# Altium PCB hiiri627v07.PcbDoc (part 1 of 3)
Units mm, origin at the board's own origin, x right, y up, seen from the top; angles counter-clockwise.
Board outline 78.49 x 90.04 mm, 2 copper layers (Top, Bottom); 69 components, 154 nets, 484 pads, 208 vias.
Unrouted connection lines stored in the file: 5.
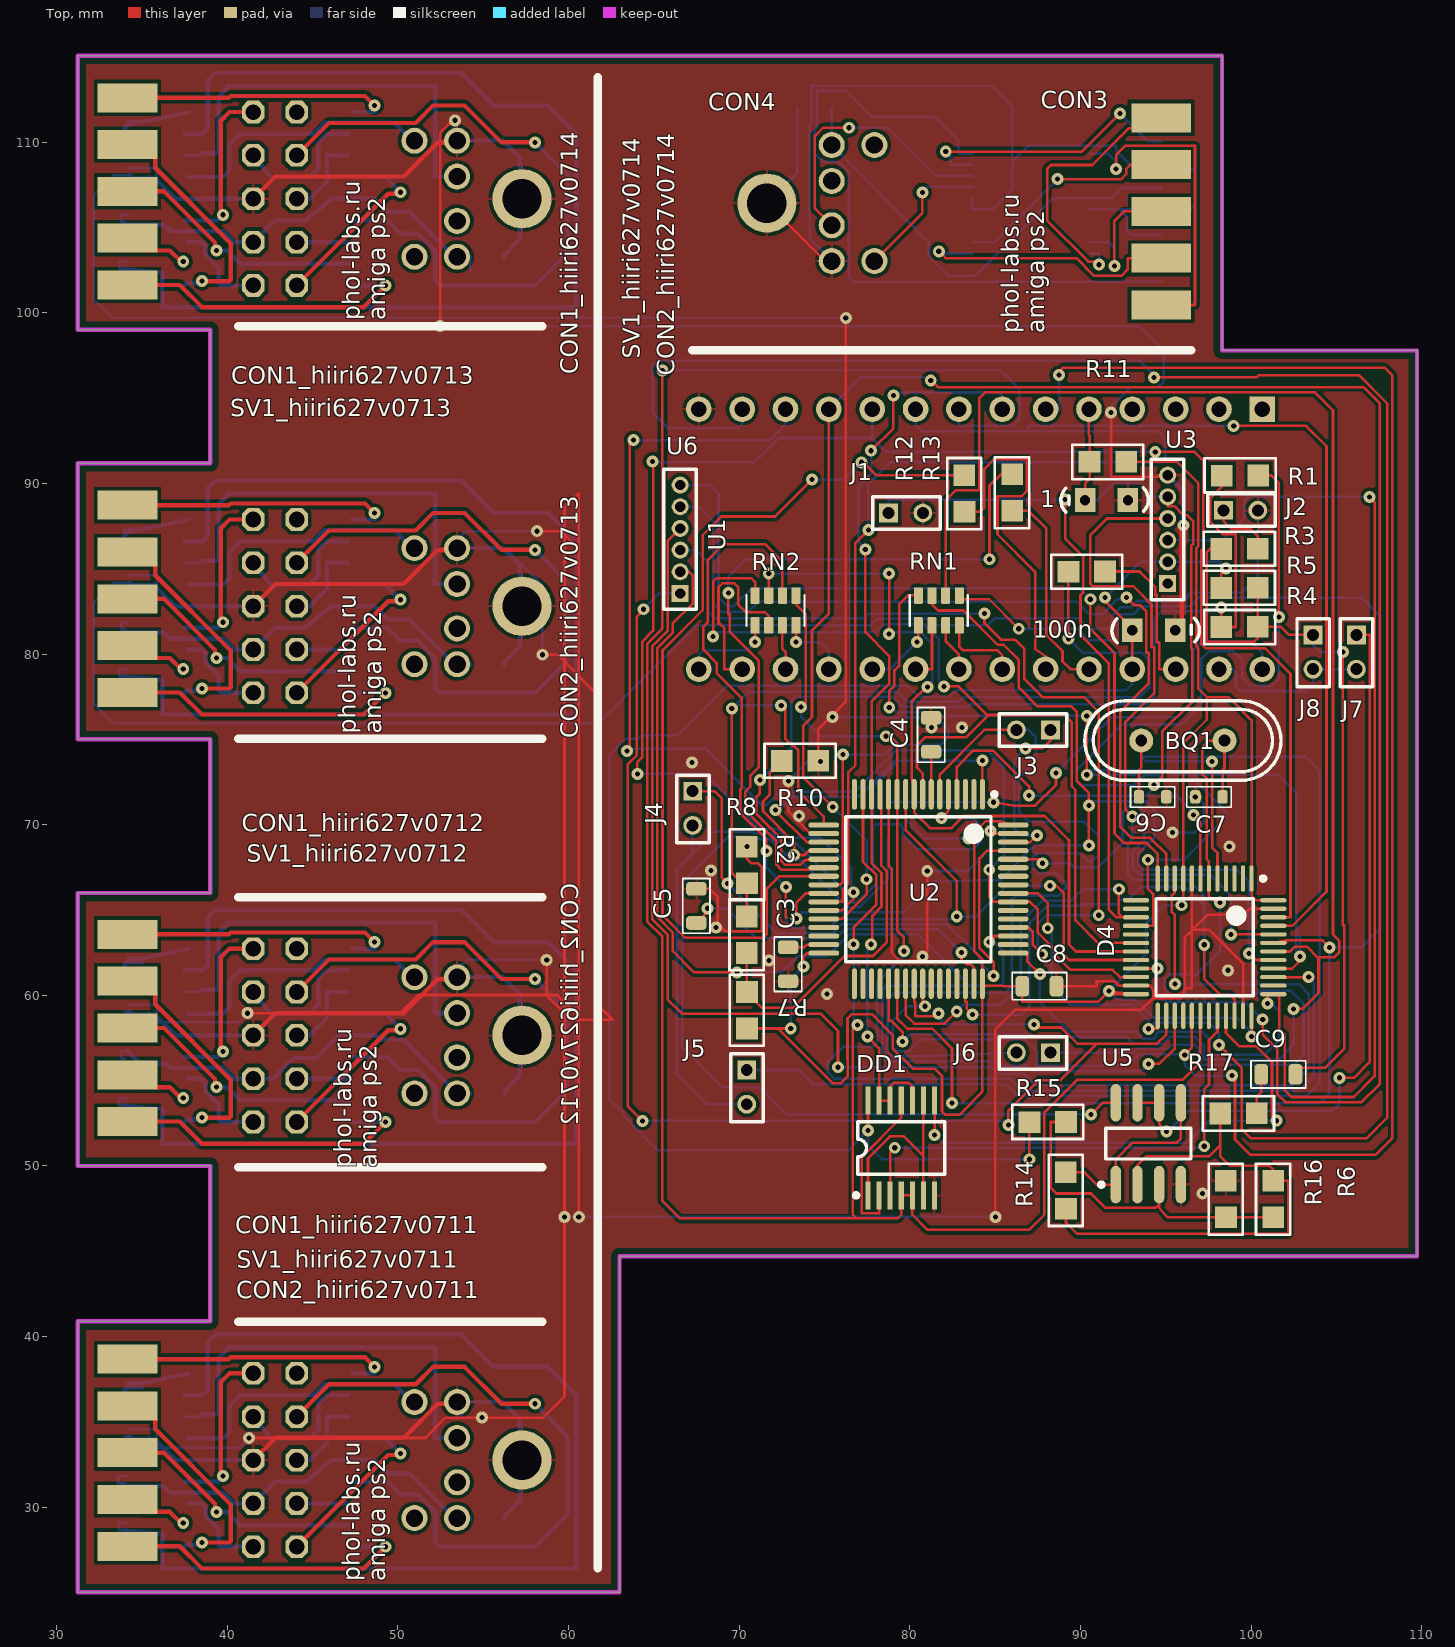
[diagram p0: Top view]
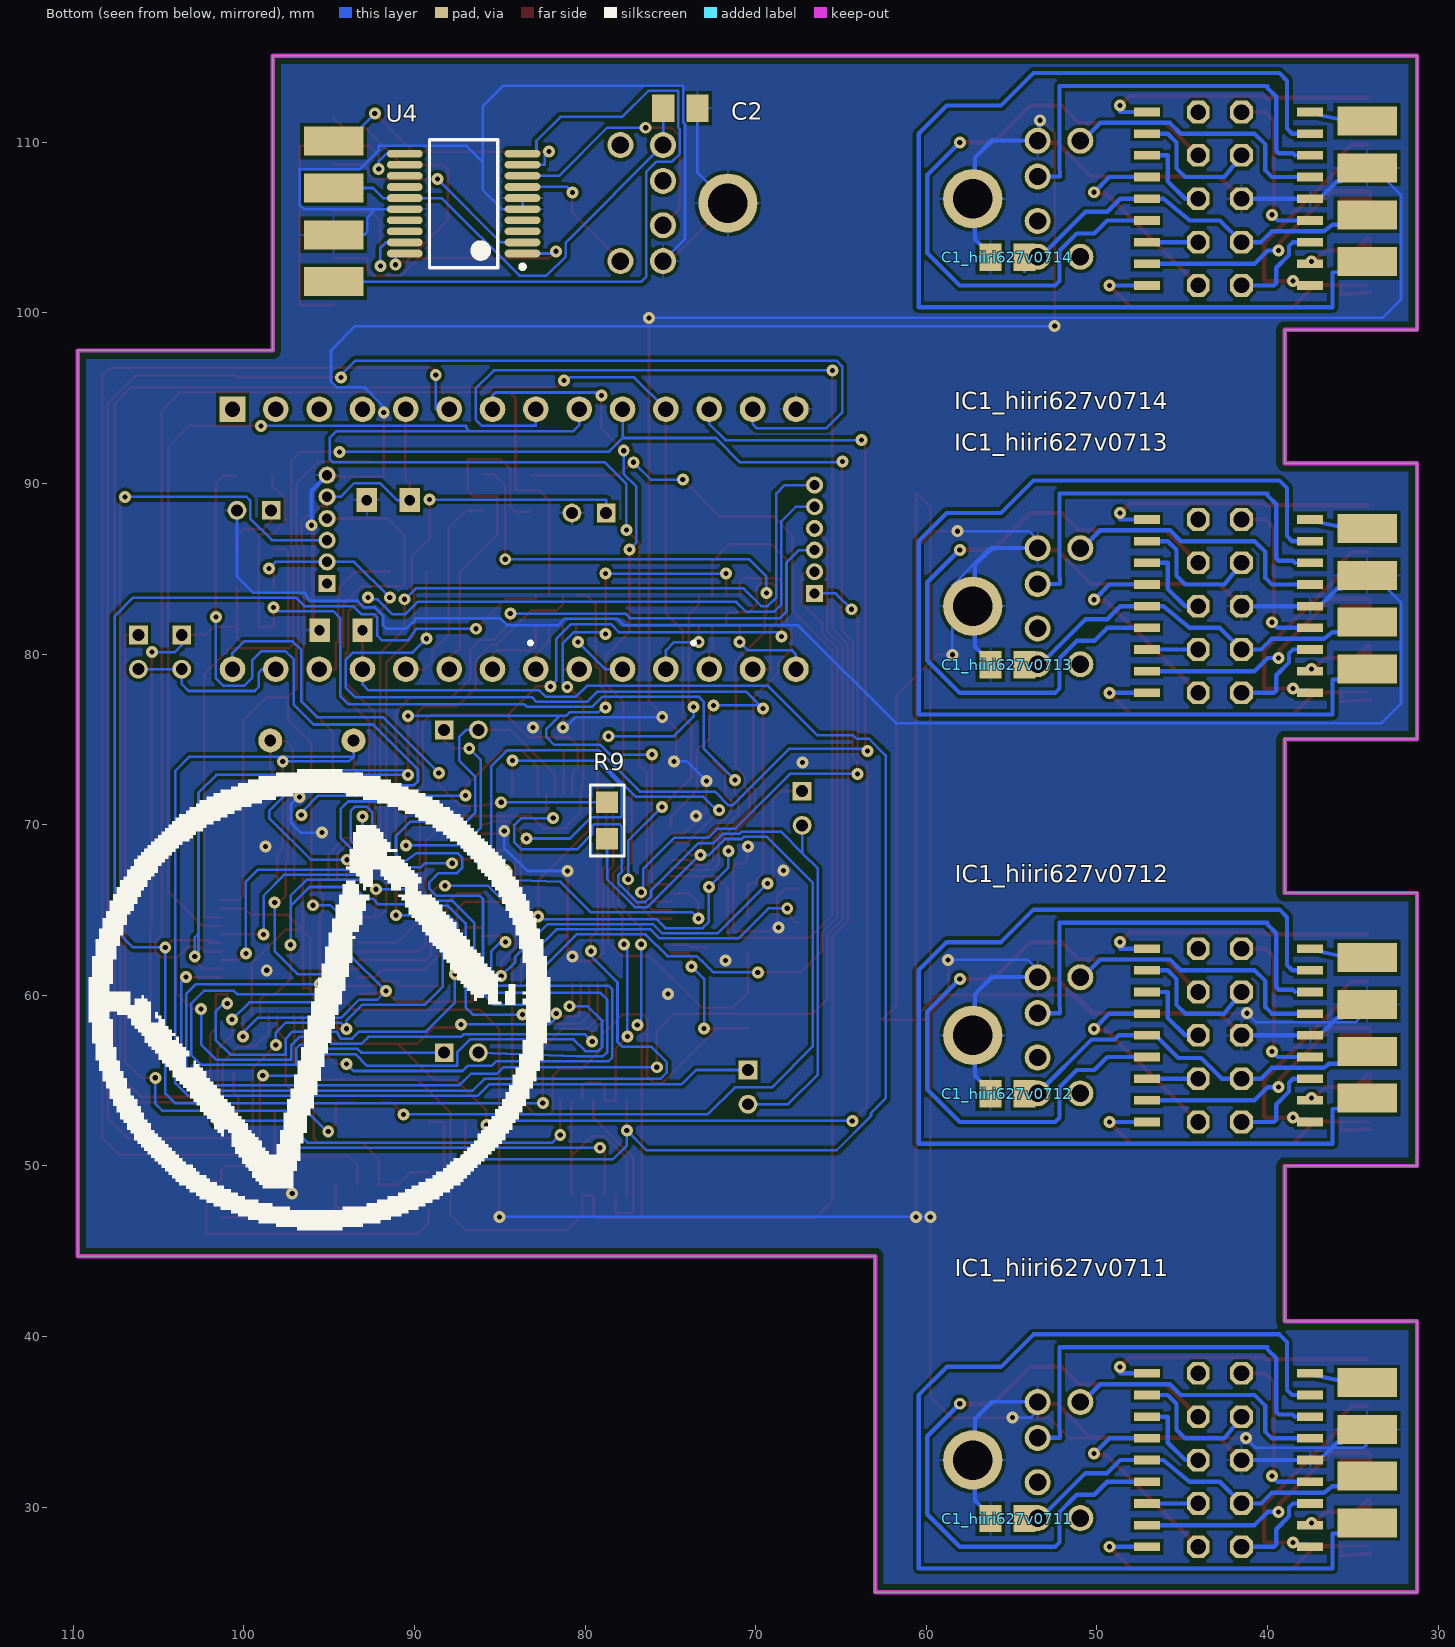
[diagram p1: Bottom view, seen from below]

## Layer stack, top to bottom
Top Solder: solder mask 0.0102, Solder Resist, Dk 3.5
Top: signal copper 0.035
Dielectric 1: dielectric 0.32, FR-4, Dk 4.8
Bottom: signal copper 0.035
Bottom Solder: solder mask 0.0102, Solder Resist, Dk 3.5

## Board outline
98.298,97.79 109.728,97.79 109.728,44.704 62.992,44.704 62.992,25.019 31.242,25.019 31.242,40.894 39,40.894 39,50 31.242,50 31.242,66 39,66 39,75 31.242,75 31.242,91.186 39,91.186 39,99 31.242,99 31.242,115.062 98.298,115.062 98.298,99

## Design rules (kind name [scope] priority, off if disabled: settings)
BackDrilling [All] p1: maxstublength=0.381 usetopbackdrill=TRUE usebottombackdrill=TRUE holeoversize=0.025 holetolplus=0 holetolminus=0
BoardOutlineClearance [All] p1: gap=0.5 ignorepadtopadclearanceinfootprint=FALSE except(0: Arc-SplitBarrior Arc-SplitContinuation Track-SplitBarrior Track-SplitContinuation SMDPad-SplitContinuation THPad-SplitContinuation Via-SplitBarrior Via-SplitContinuation Fill-SplitBarrior Fill-SplitContinuation Poly-SplitBarrior Poly-SplitContinuation Region-SplitBarrior Region-SplitContinuation Text-SplitBarrior Text-SplitContinuation)
Clearance [All] p1: gap=0.15 ignorepadtopadclearanceinfootprint=FALSE except(0.2: Arc-Fill Arc-Poly Arc-Region Track-Fill Track-Poly Track-Region SMDPad-Fill SMDPad-Poly SMDPad-Region THPad-Fill THPad-Poly THPad-Region Via-Fill Via-Poly Via-Region Fill-Fill Fill-Poly Fill-Region Poly-Poly Poly-Region Region-Region)
ComponentClearance [All] p1: gap=-0.05 collisioncheckmode=3 verticalgap=0 showdistances=TRUE
DiffPairsRouting [All] p1: maxlimit=0.15 minlimit=0.15 mostfreqgap=0.15 toplayer_minwidth=0.15 toplayer_maxwidth=0.15 toplayer_prefwidth=0.15 bottomlayer_minwidth=0.15 bottomlayer_maxwidth=0.15 bottomlayer_prefwidth=0.15 maxuncoupledlength=5
FabricationTestPointUsage TestPointUsage [All] p1: valid=0 allowmultiple=FALSE
FabricationTestpoint Testpoint [All] p1: side=3 testpointundercomponent=TRUE minsize=1.016 maxsize=2.54 preferedsize=1.524 minholesize=0.508 maxholesize=1.016 preferedholesize=0.813 testpointgrid=0.025 allowsidetop=TRUE allowsidebottom=TRUE usegrid=TRUE gridtolerance=0
Height [All] p1: minheight=0 maxheight=50 prefheight=10
HoleSize [All] p1: absolutevalues=TRUE maxlimit=5 minlimit=0.3 maxpercent=80.000 minpercent=20.000
HoleToHoleClearance [All] p1: gap=0.4 allowstackedmicrovias=TRUE
MinimumAnnularRing [All] p1: minimumring=0.2
MinimumSolderMaskSliver [All] p1: minsoldermaskwidth=0.15
PlaneClearance [All] p1: clearance=0.254
PolygonConnect [All] p1: thpad.connectstyle=Relief thpad.reliefconductorwidth=0.15 thpad.reliefentries=4 thpad.polygonreliefangle="90 Angle" thpad.airgapwidth=0.2 smdpad.connectstyle=Relief smdpad.reliefconductorwidth=0.15 smdpad.reliefentries=4 smdpad.polygonreliefangle="90 Angle" smdpad.airgapwidth=0.2 via.connectstyle=Direct via.reliefconductorwidth=0.15 via.reliefentries=4 via.polygonreliefangle="90 Angle" via.airgapwidth=0.2
RoomDefinition U_hiiri627v071_ssop [InComponentClass('U_hiiri627v071_ssop')] p1 off: confinementstyle=ConfineIn formatcopy=TRUE lockcomponents=FALSE outline 97.78,115.126 66.644,115.126 66.644,99.03 97.78,99.03
RoomDefinition hiiri627v0712 [InComponentClass('hiiri627v0712')] p2 off: confinementstyle=ConfineIn formatcopy=TRUE lockcomponents=FALSE outline 31.242,50.038 62.992,50.038 62.992,65.786 31.242,65.786
RoomDefinition U_UltiSID [InComponentClass('U_UltiSID')] p3 off: confinementstyle=ConfineIn formatcopy=TRUE lockcomponents=FALSE outline 63.246,97.282 63.246,45.329 109.296,45.329 109.296,97.282
RoomDefinition hiiri627v0711 [InComponentClass('hiiri627v0711')] p4 off: confinementstyle=ConfineIn formatcopy=TRUE lockcomponents=FALSE outline 31.242,25.146 62.992,25.146 62.992,40.894 31.242,40.894
RoomDefinition hiiri627v0713 [InComponentClass('hiiri627v0713')] p5 off: confinementstyle=ConfineIn formatcopy=TRUE lockcomponents=FALSE outline 31.242,75.184 62.992,75.184 62.992,90.932 31.242,90.932
RoomDefinition hiiri627v0714 [InComponentClass('hiiri627v0714')] p6 off: confinementstyle=ConfineIn formatcopy=TRUE lockcomponents=FALSE outline 31.242,99.06 62.992,99.06 62.992,114.808 31.242,114.808
RoutingVias [All] p1: holewidth=0.3 width=0.7 viastyle="Through Hole" minholewidth=0.3 minwidth=0.7 maxholewidth=2 maxwidth=3 useviatemplates=TRUE viatemplateguid#1={806BE7FC-D5AC-4F6C-A739-705B8047BAD4} viatemplatename#1=v70h30
SilkToSilkClearance [All] p1: silktosilkclearance=0.15
SilkToSolderMaskClearance SilkscreenOverComponentPads [IsPad] p1: minsilkscreentomaskgap=0.1 clearancetoexposedcopper=TRUE
SolderMaskExpansion [All] p1: expansion=0.075 istentingtop=FALSE
ViasUnderSMD [All] p1: allowed=TRUE
Width [All] p1: maxlimit=5 minlimit=0.15 preferedwidth=0.15
19 further rules are at their usual default settings.

## Classes and differential pairs
component class U_hiiri627v071_ssop: C2 CON3 CON4 U4
component class hiiri627v0714: C1_hiiri627v0714 CON1_hiiri627v0714 CON2_hiiri627v0714 IC1_hiiri627v0714 SV1_hiiri627v0714
component class hiiri627v0713: C1_hiiri627v0713 CON1_hiiri627v0713 CON2_hiiri627v0713 IC1_hiiri627v0713 SV1_hiiri627v0713
component class hiiri627v0712: C1_hiiri627v0712 CON1_hiiri627v0712 CON2_hiiri627v0712 IC1_hiiri627v0712 SV1_hiiri627v0712
component class hiiri627v0711: C1_hiiri627v0711 CON1_hiiri627v0711 CON2_hiiri627v0711 IC1_hiiri627v0711 SV1_hiiri627v0711
channel class hiiri627v071: M1 M2 M3 M4

## Components (designator, comment, footprint, x,y, rotation, side; value= is the part's Value field where it differs from the comment)
1 "C" "THROUGH HOLE - CAP POL (mini)" 92.786,89.017 r180 top
100n "C" "THROUGH HOLE - CAP POL (mini)" 93.04,81.397 r0 top
BQ1 "XTAL" XTAL_HC-49/U 96.005,74.93 r0 top value="8 MHz"
C1_hiiri627v0711 "C-EUC0805K" C0805K 55.245,29.083 r0 bottom (schematic designator C1)
C1_hiiri627v0712 "C-EUC0805K" C0805K 55.245,53.975 r0 bottom (schematic designator C1)
C1_hiiri627v0713 "C-EUC0805K" C0805K 55.245,79.121 r0 bottom (schematic designator C1)
C1_hiiri627v0714 "C-EUC0805K" C0805K 55.245,102.997 r0 bottom (schematic designator C1)
C2 "C-EUC0805K" C0805K 74.412,112.238 r180 bottom
C3 "CAP" C-0805 72.866,61.82 r270 top value=10.0
C4 "CAP" C-0805 81.248,75.266 r270 top value=10.0
C5 "CAP" C-0805 67.495,65.243 r90 top value=10.0
C6 "CAP" C-0603 94.234,71.628 r0 top value=12
C7 "CAP" C-0603 97.532,71.628 r180 top value=12
C8 "CAP" C-0805 87.598,60.534 r0 top value=10.0
C9 "CAP" C-0805 101.6,55.372 r0 top value=10.0
CON1_hiiri627v0711 "F09D" F09D 28.118,32.944 r90 top (schematic designator CON1)
CON1_hiiri627v0712 "F09D" F09D 28.118,57.836 r90 top (schematic designator CON1)
CON1_hiiri627v0713 "F09D" F09D 28.118,82.982 r90 top (schematic designator CON1)
CON1_hiiri627v0714 "F09D" F09D 28.118,106.858 r90 top (schematic designator CON1)
CON2_hiiri627v0711 "MINIDIN6PCB" MINIDIN6PCB 55.626,32.512 r90 top (schematic designator CON2)
CON2_hiiri627v0712 "MINIDIN6PCB" MINIDIN6PCB 55.626,57.404 r90 top (schematic designator CON2)
CON2_hiiri627v0713 "MINIDIN6PCB" MINIDIN6PCB 55.626,82.55 r90 top (schematic designator CON2)
CON2_hiiri627v0714 "MINIDIN6PCB" MINIDIN6PCB 55.626,106.426 r90 top (schematic designator CON2)
CON3 "F09D" F09D 100.777,106.193 r270 top
CON4 "MINIDIN6PCB" MINIDIN6PCB 73.278,106.68 r270 top
D4 "Microcontroller" TQFP48_L 97.282,62.82 r270 top value=STM32F103C6
DD1 "M74HC00B1R" TSSOP14 79.502,51.054 r0 top
IC1_hiiri627v0711 "PIC16F627A1010" SO18-10101020 42.291,33.02 r90 bottom (schematic designator IC1)
IC1_hiiri627v0712 "PIC16F627A1010" SO18-10101020 42.291,57.912 r90 bottom (schematic designator IC1)
IC1_hiiri627v0713 "PIC16F627A1010" SO18-10101020 42.291,83.058 r90 bottom (schematic designator IC1)
IC1_hiiri627v0714 "PIC16F627A1010" SO18-10101020 42.291,106.934 r90 bottom (schematic designator IC1)
J1 "Jumper" "2-PIN HEADER SMALL 2mm" 78.76,88.265 r0 top
J2 "Jumper" "2-PIN HEADER SMALL 2mm" 98.389,88.422 r0 top
J3 "Jumper" "2-PIN HEADER SMALL 2mm" 88.255,75.555 r180 top
J4 "Jumper" "2-PIN HEADER SMALL 2mm" 67.278,71.964 r270 top
J5 "Jumper" "2-PIN HEADER SMALL 2mm" 70.447,55.626 r270 top
J6 "Jumper" "2-PIN HEADER SMALL 2mm" 88.255,56.642 r180 top
J7 "Jumper" "2-PIN HEADER SMALL 2mm" 106.172,81.118 r270 top
J8 "Jumper" "2-PIN HEADER SMALL 2mm" 103.632,81.118 r270 top
R1 "1K" "SMD-0805 - R" 98.287,90.456 r0 top
R2 "4K7" "SMD-0805 - R" 70.453,62.477 r90 top
R3 "1K" "SMD-0805 - R" 98.253,86.158 r0 top
R4 "2K2" "SMD-0805 - R" 100.395,81.592 r180 top
R5 "4K7" "SMD-0805 - R" 98.253,83.872 r0 top
R6 "1K" "SMD-0805 - R" 98.532,46.99 r90 top
R7 "4K7" "SMD-0805 - R" 70.465,58.056 r90 top
R8 "4K7" "SMD-0805 - R" 70.453,68.714 r270 top
R9 "4K7" "SMD-0805 - R" 78.714,71.313 r270 bottom
R10 "4K7" "SMD-0805 - R" 72.502,73.737 r0 top
R11 "4K7" "SMD-0805 - R" 92.678,91.268 r180 top
R12 "1K" "SMD-0805 - R" 83.206,88.34 r90 top
R13 "1K" "SMD-0805 - R" 86.006,88.392 r90 top
R14 "4K7" "SMD-0805 - R" 89.154,47.498 r90 top
R15 "4K7" "SMD-0805 - R" 87.012,52.572 r0 top
R16 "4K7" "SMD-0805 - R" 101.307,46.99 r90 top
R17 "4K7" "SMD-0805 - R" 100.33,53.086 r180 top
RN1 "CAY16-101J4LF" RESCAF80P320X160X60-8N 81.702,82.55 r90 top
RN2 "CAY16-101J4LF" RESCAF80P320X160X60-8N 72.136,82.55 r90 top
SV1_hiiri627v0711 "ML10" ML10 42.799,32.512 r90 top (schematic designator SV1)
SV1_hiiri627v0712 "ML10" ML10 42.799,57.404 r90 top (schematic designator SV1)
SV1_hiiri627v0713 "ML10" ML10 42.799,82.55 r90 top (schematic designator SV1)
SV1_hiiri627v0714 "ML10" ML10 42.799,106.426 r90 top (schematic designator SV1)
U1 "nano Swin SID PCB" DIP-28-AY-38192-SID 100.575,94.381 r180 top locked
U2 "STM32F405RGT6" STM-LQFP64_N 80.51,66.227 r270 top
U3 "6PinConector" "6-PIN HEADER small 1.27mm" 95.113,84.132 r90 top
U4 "PIC16F627A-E/SS" SSOP-SS20_N 87.112,106.396 r0 bottom
U5 "TL072CD" SO8_N 93.98,51.308 r90 top
U6 "6PinConector" "6-PIN HEADER small 1.27mm" 66.548,83.552 r90 top
? "4K7" "SMD-0805 - R" 91.44,84.836 r180 top

## Footprints (in the part's own frame and the unit in brackets; to place one, negate y for a bottom-side part, rotate by r counter-clockwise, add the part's x,y. Pads: shape width x height; smd on the part's side, far side on the other; paste and mask are expansions set on the pad)
"2-PIN HEADER SMALL 2mm" [mm]
  rect 1.1x1.1 hole 0.7: 1(0,0)
  round 1.1 hole 0.7: 2(2.007,0)
  silkscreen extent -0.94,-0.94 3.02,0.97
"6-PIN HEADER small 1.27mm" [mm]
  rect 1x1 hole 0.6: 1(0,0)
  round 1 hole 0.6: 2(1.27,0) 3(2.54,0) 4(3.81,0) 5(5.08,0) 6(6.35,0)
  silkscreen extent -0.94,-0.94 7.29,0.97
C0805K [mm] "C0805K"
  rect 1.3x1.6 smd: 1(-1,-0.254) 2(1,-0.254)
  body extent -1.65,-1.05 1.65,0.55, height 1.27
C-0603 [mm] "Chip Capacitor, Body 1.6x0.8mm"
  rrect50% 0.6x0.8 smd: 1(-0.8,0) 2(0.8,0)
  silkscreen extent -1.3,-0.6 1.3,0.6, body extent -0.8,-0.4 0.8,0.4, height 0.82
C-0805 [mm] "Chip Capacitor, Body 2.0x1.25mm"
  rrect50% 0.8x1.2 smd: 1(-1,0) 2(1,0)
  silkscreen extent -1.6,-0.8 1.6,0.8, body extent -1,-0.62 1,0.63, height 0.62
DIP-28-AY-38192-SID [mm] "CerDIP, Window; 28 Leads; Row Spacing 15.24 mm; Pitch 2.54 mm"
  rect 1.5x1.5 hole 0.9: 1(-0.085,0.03)
  round 1.5 hole 0.9: 2(2.455,0.03) 3(4.995,0.03) 4(7.535,0.03) 5(10.075,0.03) 6(12.615,0.03) 7(15.155,0.03) 8(17.695,0.03) 9(20.235,0.03) 10(22.775,0.03) 11(25.315,0.03) 12(27.855,0.03) 13(30.395,0.03) 14(32.935,0.03) 15(32.935,15.27) 16(30.395,15.27) 17(27.855,15.27) 18(25.315,15.27) 19(22.775,15.27) 20(20.235,15.27) 21(17.695,15.27) 22(15.155,15.27) 23(12.615,15.27) 24(10.075,15.27) 25(7.535,15.27) 26(4.995,15.27) 27(2.455,15.27) 28(-0.085,15.27)
F09D [mil] "F09D"
  rect 66.93x137.8 smd: 1(-205.99,-237.98) 2(-98.01,-237.98) 3(10,-237.99) 4(118.01,-237.98) 5(225.99,-237.98)
  rect 66.93x137.8 smd far side: 6(-152,-238) 7(-44,-238) 8(64,-238) 9(172,-238)
  body extent -239,-307 259,-160, height 150
MINIDIN6PCB [mil] "MINIDIN6PCB"
  round 60 hole 40: 1(61.18,84.65) 2(-41.18,84.65) 3(143.86,84.65) 4(-123.86,84.65) 5(143.86,183.07) 6(-123.86,183.07)
  round 136.5 / inner round 60 / far side round 136.5 hole 91: G(10,-64.96)
  body extent -154,-111 174,213, height 50
ML10 [mil] "ML10"
  oct 52.29x52.29 / inner oct 60x60 / far side oct 52.29x52.29 hole 36: 1(-190,-50) 2(-190,50) 3(-90,-50) 4(-90,50) 5(10,-50) 6(10,50) 7(110,-50) 8(110,50) 9(210,-50) 10(210,50)
  body extent -220,-80 240,80, height 150
RESCAF80P320X160X60-8N [mm]
  rrect25% 0.97x0.53 smd: 1(-0.875,-1.2) 2(-0.875,-0.4) 3(-0.875,0.4) 4(-0.875,1.2) 5(0.875,1.2) 6(0.875,0.4) 7(0.875,-0.4) 8(0.875,-1.2)
  silkscreen extent -0.9,-1.7 0.9,1.7
"SMD-0805 - R" [mm]
  rect 1.27x1.27 smd: 1(0,0) 2(2.142,0.006)
  silkscreen extent -1.02,-0.99 3.15,1.02
SO8_N [mm] "SOIC, 8-Leads, Body 4.9x3.9mm, Pitch 1.27mm, IPC Medium Density"
  oval 2.2x0.6 smd: 1(-2.4,1.905) 2(-2.4,0.635) 3(-2.4,-0.635) 4(-2.4,-1.905) 5(2.4,-1.905) 6(2.4,-0.635) 7(2.4,0.635) 8(2.4,1.905)
  silkscreen extent -2.52,-2.5 0.9,2.88, body extent -1.95,-2.45 1.95,2.45, height 1.75
SO18-10101020 [mil] "SO18-10101020"
  rect 20x60 smd: 1(-210,-188.5) 2(-160,-188.5) 3(-110,-188.5) 4(-60,-188.5) 5(-10,-188.5) 6(40,-188.5) 7(90,-188.5) 8(140,-188.5) 9(190,-188.5) 10(190,188.5) 11(140,188.5) 12(90,188.5) 13(40,188.5) 14(-10,188.5) 15(-60,188.5) 16(-110,188.5) 17(-160,188.5) 18(-210,188.5)
  body extent -220,-218 200,218, height 50
SSOP-SS20_N [mm] "SOP, 20-Leads, Body 7.2x5.2mm, Pitch 0.65mm, IPC Medium Density"
  oval 2.1x0.45 smd: 1(-3.45,2.925) 2(-3.45,2.275) 3(-3.45,1.625) 4(-3.45,0.975) 5(-3.45,0.325) 6(-3.45,-0.325) 7(-3.45,-0.975) 8(-3.45,-1.625) 9(-3.45,-2.275) 10(-3.45,-2.925) 11(3.45,-2.925) 12(3.45,-2.275) 13(3.45,-1.625) 14(3.45,-0.975) 15(3.45,-0.325) 16(3.45,0.325) 17(3.45,0.975) 18(3.45,1.625) 19(3.45,2.275) 20(3.45,2.925)
  silkscreen extent -3.57,-3.75 2,3.82, body extent -2.7,-3.75 2.7,3.75, height 2
STM-LQFP64_N [mm] "Thin QFP, 64-Leads, Body 10x10mm, Pitch 0.5mm, IPC Medium Density"
  oval 1.8x0.3 smd: 1(-5.55,3.75) 2(-5.55,3.25) 3(-5.55,2.75) 4(-5.55,2.25) 5(-5.55,1.75) 6(-5.55,1.25) 7(-5.55,0.75) 8(-5.55,0.25) 9(-5.55,-0.25) 10(-5.55,-0.75) 11(-5.55,-1.25) 12(-5.55,-1.75) 13(-5.55,-2.25) 14(-5.55,-2.75) 15(-5.55,-3.25) 16(-5.55,-3.75) 33(5.55,-3.75) 34(5.55,-3.25) 35(5.55,-2.75) 36(5.55,-2.25) 37(5.55,-1.75) 38(5.55,-1.25) 39(5.55,-0.75) 40(5.55,-0.25) 41(5.55,0.25) 42(5.55,0.75) 43(5.55,1.25) 44(5.55,1.75) 45(5.55,2.25) 46(5.55,2.75) 47(5.55,3.25) 48(5.55,3.75)
  oval 0.3x1.8 smd: 17(-3.75,-5.55) 18(-3.25,-5.55) 19(-2.75,-5.55) 20(-2.25,-5.55) 21(-1.75,-5.55) 22(-1.25,-5.55) 23(-0.75,-5.55) 24(-0.25,-5.55) 25(0.25,-5.55) 26(0.75,-5.55) 27(1.25,-5.55) 28(1.75,-5.55) 29(2.25,-5.55) 30(2.75,-5.55) 31(3.25,-5.55) 32(3.75,-5.55) 49(3.75,5.55) 50(3.25,5.55) 51(2.75,5.55) 52(2.25,5.55) 53(1.75,5.55) 54(1.25,5.55) 55(0.75,5.55) 56(0.25,5.55) 57(-0.25,5.55) 58(-0.75,5.55) 59(-1.25,5.55) 60(-1.75,5.55) 61(-2.25,5.55) 62(-2.75,5.55) 63(-3.25,5.55) 64(-3.75,5.55)
  silkscreen extent -5.67,-4.25 4.25,4.58, body extent -5,-5 5,5, height 1.6
"THROUGH HOLE - CAP POL (mini)" [mm]
  rect 1.2x1.4 hole 0.6: 1(0,0) 2(2.515,0)
  silkscreen extent -1.19,-0.74 3.93,0.71
TQFP48_L [mm] "48-Pin Thin Quad Flat Pack 0.5 mm Pitch, IPC High Density"
  oval 1.55x0.25 smd: 1(-4.025,2.75) 2(-4.025,2.25) 3(-4.025,1.75) 4(-4.025,1.25) 5(-4.025,0.75) 6(-4.025,0.25) 7(-4.025,-0.25) 8(-4.025,-0.75) 9(-4.025,-1.25) 10(-4.025,-1.75) 11(-4.025,-2.25) 12(-4.025,-2.75) 25(4.025,-2.75) 26(4.025,-2.25) 27(4.025,-1.75) 28(4.025,-1.25) 29(4.025,-0.75) 30(4.025,-0.25) 31(4.025,0.25) 32(4.025,0.75) 33(4.025,1.25) 34(4.025,1.75) 35(4.025,2.25) 36(4.025,2.75)
  oval 0.25x1.55 smd: 13(-2.75,-4.025) 14(-2.25,-4.025) 15(-1.75,-4.025) 16(-1.25,-4.025) 17(-0.75,-4.025) 18(-0.25,-4.025) 19(0.25,-4.025) 20(0.75,-4.025) 21(1.25,-4.025) 22(1.75,-4.025) 23(2.25,-4.025) 24(2.75,-4.025) 37(2.75,4.025) 38(2.25,4.025) 39(1.75,4.025) 40(1.25,4.025) 41(0.75,4.025) 42(0.25,4.025) 43(-0.25,4.025) 44(-0.75,4.025) 45(-1.25,4.025) 46(-1.75,4.025) 47(-2.25,4.025) 48(-2.75,4.025)
  silkscreen extent -4.15,-2.85 2.85,3.55, body extent -3.5,-3.5 3.5,3.5, height 1.6
TSSOP14 [mm] "Shrink Small Outline; 14 Leads; Body Width 4.4 mm; Pitch 0.65 mm"
  rect 0.3x1.65 smd: 1(-1.95,-2.775) 2(-1.3,-2.775) 3(-0.65,-2.775) 4(0,-2.775) 5(0.65,-2.775) 6(1.3,-2.775) 7(1.95,-2.775) 8(1.95,2.775) 9(1.3,2.775) 10(0.65,2.775) 11(0,2.775) 12(-0.65,2.775) 13(-1.3,2.775) 14(-1.95,2.775)
  silkscreen extent -2.77,-2.9 2.55,1.55
XTAL_HC-49/U [mm] "HC-49/U Leaded Cristal, Body 11.05x4.8mm; Pitch 4.88mm"
  round 1.4 hole 0.7: 1(-2.44,0) 2(2.44,0)
  silkscreen extent -5.75,-2.33 5.75,2.33, body extent -5.75,-2.33 5.75,2.33, height 3.5

## Part data
BQ1: "Crystal Oscillator", Manufacturer=NDK, Package=3225, Part Number=NX3225GD-8MHZ-STD-CRA-3, Tolerance="50 ppm", Parameters="8 MHz 8pF 50 ppm"
C1_hiiri627v0711 C1_hiiri627v0712 C1_hiiri627v0713 C1_hiiri627v0714 C2: "CAPACITOR, European symbol", DeviceName=C0805K, DeviceSetName=C-EU, GateName_1=G$1, LibraryName=rcl, SymbolName_1=C-EU
C3 C4 C5 C8 C9: "Capacitor", Alt Part Num=CC0805KKX7R6BB106, Manufacturer=Yageo, Package=0805, Part Number="0805-10uF 10V +/-10% X7R", Tolerance=10%, Parameters="X7R, 10V", Unit Price=0.0359
C6 C7: "Capacitor", Alt Part Num=CL10C120JB8NNNC, Manufacturer=Samsung, Package=0603, Part Number="0603-12pF 50V +/-5% NP0", Tolerance=5%, Parameters="NP0, 50V", Unit Price=0.0018
CON1_hiiri627v0711 CON1_hiiri627v0712 CON1_hiiri627v0713 CON1_hiiri627v0714 CON3: "SUB-D", DeviceName=D, DeviceSetName=F09, GateName_1=G$1, LibraryName=con-subd, SymbolName_1=F09
D4: library part STM32F103Cx, "MC Cortex-M3", Manufacturer=ST, Package=LQFP-48, Part Number=STM32F103C6T6A, Parameters=16-32K
DD1: "Quad 2-Input AND Gate TSSOP", ComponentLink1Description="Manufacturer Link", ComponentLink1URL=http://www.st.com/, ComponentLink2Description=Datasheet, ComponentLink2URL=http://www.st.com/stonline/products/literature/ds/1885/m74hc08.pdf, DatasheetVersion=Dec-1992, LatestRevisionDate=06-Jun-2005, LatestRevisionNote="Stylized 3D Model Added.", PackageDescription="DIP; 14 Leads; Row Spacing 7.62 mm; Pitch 2.54 mm", PackageReference=DIP14, PackageVersion=Jan-1997, Published=8-Jun-2000, Publisher="Altium Limited"
R1 R2 R3 R4 R5 R6 R7 R8 R9 R10 R11 R12 R13 R14 R15 R16 R17 ?: library part R
RN1 RN2: "10k Ohm Â±5% 62.5mW Power Per Element Isolated Resistor Network/Array Â±200ppm/Â°C 1206 (3216 Metric), Convex, Long Side Terminals", Package="1206 Bourns", Arrow_Electronics-Purchase-URL=https://snapeda.com/shop?store=Arrow+Electronics&id=47136, Availability=Good, DigiKey-Purchase-URL=https://snapeda.com/shop?store=DigiKey&id=47136, MF=Bourns, Mouser-Purchase-URL=https://snapeda.com/shop?store=Mouser&id=47136, MP=CAY16-103J4LF, Price=None, SnapEDA_Link=https://www.snapeda.com/parts/CAY16-103J4LF/Bourns%20-%20J.W.%20Miller/view-part/47136/?ref=snap
SV1_hiiri627v0711 SV1_hiiri627v0712 SV1_hiiri627v0713 SV1_hiiri627v0714: "HARTING", DeviceSetName=ML10, GateName_1=G$1, LibraryName=con-harting-ml, SymbolName_1=10P
U1: library part MOS6581_SID
U2: "ARM Cortex-M4 32-bit MCU+FPU, 210 DMIPS, 1024 kB Flash, 192 kB Internal RAM, 51 I/Os, 64-pin LQFP, -40 to 85 degC, Tray", I/Os (High Current)=51, Manufacturer=STMicroelectronics, Operating Frequency(F) (Processor speed) (MHz)=168, Supplier Part Number 1=497-11767-ND, Supply Voltage(Vcc) max (V)=3.6, Supply Voltage(Vcc) min (V)=1.8, ComponentLink1Description="Manufacturer URL", ComponentLink1URL=http://www.st.com/web/en/home.html, ComponentLink2Description=Datasheet, ComponentLink2URL=http://www.st.com/st-web-ui/static/active/en/resource/technical/document/datasheet/DM00037051.pdf, ComponentLink3Description="Package Specification", ComponentLink3URL=http://www.st.com/st-web-ui/static/active/en/resource/technical/document/datasheet/DM00037051.pdf, Core="ARM Cortex-M4", D/A Converter=2x12-bit, DatasheetVersion="Rev. 4", FLASH Size (Prog) (kB)=1024, Internal RAM Size (kB)=192, Mounting Technology="Surface Mount", PackageDescription="64-Pin Low Profile Quad Flat Package, 10 x 10 mm Body, 0.5 mm Pitch", PackageReference=LQFP64, PackageVersion="Rev. 4, 06/2013", Packing=Tray, PartNumber=STM32F405RGT6, Supplier 1=Digi-Key, Supplier 2=Farnell, Supplier 3=Newark, Supplier 4=Mouser, Supplier Part Number 2=2064363, Supplier Part Number 3=73T2329, Supplier Part Number 4=511-STM32F405RGT6
U4: "FLASH-Based 8-Bit CMOS Microcontroller with nanoWatt Technology, 1K (x14-Bit words) FLASH, 224 Bytes SRAM, 20-Pin SSOP, 3.0 to 5.5V Supply Range, Extended Temperature", Supplier Part Number 1=PIC16F627A-E/SS-ND, Code_IPC=SOP65P780-20, Code_JEDEC=MO-150, ComponentLink1Description=Datasheet, ComponentLink1URL=http://ww1.microchip.com/downloads/en/DeviceDoc/40044F.pdf, ComponentLink2Description="Packaging Specification", ComponentLink2URL=http://www.microchip.com/stellent/groups/techpub_sg/documents/packagingspec/en012702.pdf, ComponentLink3Description="Microchip.com Home", ComponentLink3URL=http://www.microchip.com/, DatasheetVersion="revF, Mar-2007", LatestRevisionDate=29-Jan-2009, LatestRevisionNote="Sch. layout revised. 3D Model Removed.", PackageDescription="20-Lead Plastic Shrink Small Outline (SS) - 5.3mm Body [SSOP]", PackageReference=SSOP-SS20, PackageVersion="revBB, Aug-2009", Published=11-Oct-2004, Publisher="Altium Limited", Supplier 1=Digi-Key
U5: "Low-Noise J-FET Dual Operational Amplifier", Code_IPC=SOIC127P600-8, Code_JEDEC=MS-012-AA, ComponentLink1Description="Manufacturer Link", ComponentLink1URL=http://www.st.com/, ComponentLink2Description=Datasheet, ComponentLink2URL=http://www.st.com/stonline/products/literature/ds/2298/tl072.pdf, DatasheetVersion=Dec-1998, LatestRevisionDate=13-Apr-2006, LatestRevisionNote="IPC-7351 Footprint Added.", PackageDescription="8-Pin Small Outline Integrated Circuit 1.27 mm Pitch", PackageReference=SO8, PackageVersion=Dec-2002, Published=24-Aug-2001, Publisher="Altium Limited"
CON2_hiiri627v0711 CON2_hiiri627v0712 CON2_hiiri627v0713 CON2_hiiri627v0714 CON4: DeviceSetName=MINIDIN6PCB, GateName_1=G$1, LibraryName=0mikacon, SymbolName_1=MINIDIN6PCB_SYM
IC1_hiiri627v0711 IC1_hiiri627v0712 IC1_hiiri627v0713 IC1_hiiri627v0714: DeviceName=1010, DeviceSetName=PIC16F627A, GateName_1=G$1, LibraryName=0mikalib, SymbolName_1=PIC16F627_SYM

## Via types
v1: diameter 0.7, hole 0.3, Top to Bottom, tented both sides, 208 vias

## Nets (pads, with @x,y where several pads share a name; then routed paths per layer and width w, separated by ;. In a path a pad name is that pad's centre, name@x,y a point inside that pad or via, vN(x,y) a via of type N, cw(c..) or ccw(c..) an arc to the next point about the centre after c; other vN are vias at no path point)
3V3: C8.1 D4.1 D4.9 D4.24 D4.36 D4.48 R7.1 R11.1 U2.1 U2.19 U2.32 U2.48 U2.64 | length 154.4
  Top w0.15: R7.1@70.465,58.056 72.271,58.056 ; v1(72.136,70.866) 72.136,70.806 73.965,68.977 U2.19@74.96,68.977 ; v1(73.025,58.056) 72.271,58.056 ; v1(73.762,61.697) 73.762,62.274 73.965,62.477 U2.32@74.96,62.477 ; U2.1@84.26,71.777 v1(84.26,73.752) ; U2.64@86.06,69.977 85.309,70.202 84.451,70.202 v1(83.439,69.19) 83.769,68.859 83.769,62.586 84.26,62.095 U2.48@84.26,60.677 U2.48@84.26,60.563 ; R11.1@92.678,91.268 95.65,91.268 96.906,90.012 96.906,86.315 96.793,86.202 96.793,80.456 96.906,80.342 96.906,77.978 97.404,77.48 ; v1(95.936,65.278) 96.032,65.374 D4.9@96.032,66.845 96.032,74.778 97.404,76.149 97.404,77.48 ; v1(100.032,57.582) D4.36@100.032,58.796 ; D4.48@101.307,65.571 100.298,65.571 100.032,65.837 D4.1@100.032,66.845 100.032,76.113 98.665,77.48 97.404,77.48 ; 72.271,58.056 75.489,54.839 75.937,54.839 76.369,55.27 76.369,56.261 76.352,56.261 76.352,58.649 76.606,58.903 77.775,58.903 78.994,57.683 78.994,56.896 80.188,55.702 81.458,55.702 81.89,55.27 81.89,53.204 82.093,53.001 82.906,53.001 84.26,54.355 U2.48@84.26,60.563 ; U2.48@84.26,60.563 85.458,60.563 85.486,60.534 C8.1@86.598,60.534 86.598,59.614 91.034,59.614 v1(91.669,60.249) ; v1(91.669,60.249) D4.24@93.257,60.07 91.669,60.07 v1(91.669,60.249)
  Bottom w0.15: v1(72.136,70.866) 72.285,70.866 72.457,71.039 72.477,71.039 73.066,71.628 77.001,71.628 77.851,72.478 ; v1(73.025,58.056) 73.025,60.96 v1(73.762,61.697) ; v1(83.439,69.19) 80.899,69.19 80.874,69.19 80.594,69.494 79.654,70.434 77.851,70.434 77.851,72.275 ; v1(84.26,73.752) 79.266,73.752 ; v1(95.936,65.278) 94.92,65.278 93.853,64.211 93.853,62.433 v1(91.669,60.249) 92.177,59.741 93.239,59.741 94.28,58.699 99.162,58.699 100.032,57.829 v1(100.032,57.582) ; 77.851,72.275 79.045,73.469 ; 77.851,72.275 77.851,72.478 ; 77.851,72.478 79.125,73.752 79.266,73.752 ; 77.851,72.478 79.045,73.469 ; 79.045,73.469 79.266,73.752
6581SEL: D4.15 J1.1 U2.39 | length 59.8
  Top w0.15: U2.39@79.76,60.677 79.76,58.846 80.264,58.342 82.04,58.342 v1(82.753,59.055) ; v1(89.103,89.052) 89.103,86.766 90.158,85.712 90.158,83.601 90.005,83.449 90.005,81.115 91.655,79.465 91.655,65.024 92.108,64.571 92.456,64.571 ; v1(92.253,66.218) 92.253,64.774 92.456,64.571 ; D4.15@93.257,64.571 92.456,64.571
  Bottom w0.15: J1.1@78.76,88.265 78.76,89.052 v1(89.103,89.052) ; v1(82.753,59.055) 83.15,59.452 85.344,59.452 86.501,60.609 86.501,64.265 87.782,65.546 89.459,65.546 90.131,66.218 v1(92.253,66.218)
!CS: D4.30 DD1.4 DD1.5 U1.8 U2.15 | length 148.2
  Top w0.15: v1(65.507,96.62) 65.507,81.486 64.611,80.591 64.611,64.332 65.507,63.437 65.507,47.955 66.533,46.929 76.882,46.929 ; v1(76.708,62.992) 76.708,63.983 78.045,65.32 78.045,67.04 77.26,67.825 U2.15@77.26,71.777 ; v1(76.937,58.268) 76.669,58 76.669,47.142 76.882,46.929 ; D4.30@97.032,58.796 97.032,56.083 95.991,55.042 89.793,55.042 87.884,53.133 87.884,47.142 86.995,46.253 81.041,46.253 80.152,47.142 DD1.5@80.152,48.279 DD1.4@79.502,48.279 79.502,47.142 79.289,46.929 76.882,46.929
  Bottom w0.15: v1(65.507,96.62) 85.344,96.62 86.411,95.553 86.411,93.751 86.035,93.376 82.88,93.376 U1.8@82.88,94.351 ; v1(76.708,62.992) 76.708,58.547 76.937,58.318 v1(76.937,58.268)
!READ: D4.32 DD1.3 | length 29
  Top w0.15: DD1.3@78.852,48.279 78.852,50.8 v1(79.12,51.068) ; v1(97.257,51.156) 97.257,54.508 97.536,54.788 97.536,57.379 98.032,57.875 D4.32@98.032,58.796
  Bottom w0.15: v1(79.12,51.068) 97.169,51.068 v1(97.257,51.156)
!RES: 1.2 D4.7 R11.2 U1.5 U2.4 U3.5 | length 52.4
  Top w0.15: U2.4@82.76,71.777 82.76,73.387 83.718,74.346 84.887,74.346 86.995,72.238 v1(86.995,71.704) ; 1.2@90.272,89.017 90.272,89.992 90.536,90.257 R11.2@90.536,91.263 90.536,92.786 90.5,92.822 U1.5@90.5,94.351 ; v1(94.31,72.314) 94.793,72.796 94.793,75.454 96.555,77.216 96.555,80.269 96.493,80.331 96.493,86.326 96.606,86.44 96.606,87.785 96.27,88.122 96.054,88.122 95.504,88.671 95.113,88.671 U3.5@95.113,89.212 ; v1(96.626,70.557) 97.032,70.151 D4.7@97.032,66.845
  Bottom w0.15: v1(86.995,71.704) 93.878,71.704 ; 1.2@90.272,89.017 91.008,89.017 92.009,90.018 93.523,90.018 94.328,89.212 U3.5@95.113,89.212 ; v1(94.31,72.314) 94.31,72.136 93.878,71.704 ; v1(96.626,70.557) 96.626,70.714 95.635,71.704 93.878,71.704
!WRITE: D4.33 DD1.8 | length 30.7
  Top w0.15: v1(81.452,51.825) DD1.8@81.452,53.829 ; D4.33@98.532,58.796 98.532,57.805 99.33,57.007 100.305,57.007 101.229,56.083 101.229,52.924 v1(101.498,52.654)
  Bottom w0.15: v1(81.452,51.825) 81.909,51.368 96.266,51.368 97.552,52.654 v1(101.498,52.654)
/2: D4.29 U1.6 U2.41 | length 111.6
  Top w0.15: U2.41@80.76,60.677 80.76,59.499 v1(80.899,59.36) ; v1(88.748,96.342) 88.748,96.491 88.902,96.645 88.902,96.701 88.989,96.789 107.808,96.789 108.281,96.316 108.281,51.639 107.29,50.648 99.974,50.648 99.06,51.562 99.06,55.296 v1(98.882,55.296) ; v1@96.072,56.557 v1(96.114,56.515) 96.532,56.933 D4.29@96.532,58.796
  Bottom w0.15: v1(80.899,59.36) 79.841,59.36 79.003,58.522 79.003,56.972 79.248,56.727 79.985,56.727 80.674,57.417 86.752,57.417 87.48,56.689 87.48,55.867 92.773,55.867 93.463,56.557 v1@96.072,56.557 ; U1.6@87.96,94.351 88.748,94.351 v1(88.748,96.342) ; v1(96.114,56.515) 96.114,55.905 96.723,55.296 v1(98.882,55.296)
_MCLR/VPP: U4.4
_MCLR/VPP_hiiri627v0711: IC1_hiiri627v0711.4 SV1_hiiri627v0711.10 | length 10.1
  Top w0.254: v1(39.751,31.826) 39.624,31.953 39.624,37.338 40.132,37.846 SV1_hiiri627v0711.10@41.529,37.846
  Bottom w0.254: IC1_hiiri627v0711.4@37.503,31.496 39.421,31.496 v1(39.751,31.826)
_MCLR/VPP_hiiri627v0712: IC1_hiiri627v0712.4 SV1_hiiri627v0712.10 | length 10.1
  Top w0.254: v1(39.751,56.718) 39.624,56.845 39.624,62.23 40.132,62.738 SV1_hiiri627v0712.10@41.529,62.738
  Bottom w0.254: IC1_hiiri627v0712.4@37.503,56.388 39.421,56.388 v1(39.751,56.718)
_MCLR/VPP_hiiri627v0713: IC1_hiiri627v0713.4 SV1_hiiri627v0713.10 | length 10.1
  Top w0.254: v1(39.751,81.864) 39.624,81.991 39.624,87.376 40.132,87.884 SV1_hiiri627v0713.10@41.529,87.884
  Bottom w0.254: IC1_hiiri627v0713.4@37.503,81.534 39.421,81.534 v1(39.751,81.864)
_MCLR/VPP_hiiri627v0714: IC1_hiiri627v0714.4 SV1_hiiri627v0714.10 | length 10.1
  Top w0.254: v1(39.751,105.74) 39.624,105.867 39.624,111.252 40.132,111.76 SV1_hiiri627v0714.10@41.529,111.76
  Bottom w0.254: IC1_hiiri627v0714.4@37.503,105.41 39.421,105.41 v1(39.751,105.74)
A0: D4.45 U1.9 U2.26 | length 109.7
  Top w0.15: U2.26@74.96,65.477 76.028,65.477 76.085,65.534 76.085,66.23 76.385,66.53 76.385,70.663 76.385,73.057 76.81,73.482 76.81,86.512 v1(77.572,87.274) ; v1(98.984,93.37) 103.226,93.37 104.419,92.177 104.419,66.077 102.413,64.07 D4.45@101.307,64.07
  Bottom w0.15: v1(77.572,87.274) 77.572,89.967 78.842,91.237 94.767,91.237 94.971,91.44 94.971,92.659 94.564,93.066 86.766,93.066 ; U1.9@80.34,94.351 80.34,93.406 80.681,93.066 86.766,93.066 ; v1(98.984,93.37) 86.97,93.37 86.97,93.269 86.766,93.066
A1: D4.46 U1.10 U2.27 | length 104.9
  Top w0.15: v1(64.036,72.974) 64.036,73.67 64.311,73.945 64.311,80.715 64.964,81.368 64.964,91.25 v1(64.922,91.291) ; U2.27@74.96,64.977 76.026,64.977 76.708,65.659 v1(76.708,66.04) ; v1(94.386,91.846) 96.672,91.846 97.206,91.312 97.206,86.191 97.093,86.078 97.093,80.58 97.333,80.34 100.813,80.34 102.311,78.842 102.311,64.571 D4.46@101.307,64.571
  Bottom w0.15: v1(64.036,72.974) 67.996,72.974 71.208,69.762 72.24,69.762 72.778,69.224 74.778,69.224 76.581,67.421 76.581,65.888 76.708,66.015 v1(76.708,66.04) ; v1(64.922,91.291) 64.977,91.237 70.909,91.237 72.332,92.659 77.8,92.659 ; U1.10@77.8,94.351 77.8,92.659 ; v1(94.386,91.846) 78.613,91.846 77.8,92.659
A2: D4.21 U1.11 U2.28 | length 128.1
  Top w0.15: U2.28@74.96,64.477 76.028,64.477 77.47,65.919 v1(77.47,66.802) ; U1.11@75.26,94.351 75.26,82.367 74.27,81.377 74.27,76.311 73.762,75.803 73.762,72.768 v1(75.486,71.044) ; v1(81.229,96.037) 81.246,96.037 81.644,95.639 106.596,95.639 107.547,94.688 107.547,54.811 106.477,53.741 102.006,53.741 101.529,54.219 101.529,56.862 100.682,57.709 v1(100.682,58.576) ; D4.21@93.257,61.571 v1(94.513,61.571)
  Bottom w0.15: U1.11@75.26,94.351 77.123,96.214 80.903,96.214 81.08,96.037 v1(81.229,96.037) ; v1(75.486,71.044) 77.47,69.06 v1(77.47,66.802) ; v1(94.513,61.571) 94.513,60.147 95.077,59.584 99.674,59.584 v1(100.682,58.576)
A3: D4.22 U1.12 U2.55 | length 73.3
  Top w0.15: v1(63.436,74.307) 63.59,74.461 63.59,92.318 v1(63.805,92.532) ; v1(84.658,67.361) 84.658,65.756 84.938,65.477 U2.55@86.06,65.477 87.05,65.477 87.503,65.024 87.503,63.669 88.468,62.703 88.468,62.433 89.408,61.493 91.884,61.493 92.307,61.07 D4.22@93.257,61.07
  Bottom w0.15: v1(63.436,74.307) 63.59,74.461 68.018,74.461 71.349,71.129 71.586,71.129 72.39,71.933 76.784,71.933 79.223,74.371 84.531,74.371 85.496,73.406 85.496,68.199 v1(84.658,67.361) ; v1(63.805,92.532) 71.78,92.532 72.72,93.472 U1.12@72.72,94.351
A4: D4.25 U1.13 U2.56 | length 131.1
  Top w0.15: U2.56@86.06,65.977 87.508,65.977 88.087,65.398 v1(88.087,63.932) ; v1(93.98,58.039) 94.532,58.039 D4.25@94.532,58.796 ; v1(94.31,96.214) 100.324,96.214 100.452,96.342 106.317,96.342 107.981,94.678 107.981,52.832 106.787,51.638 99.974,51.638 99.466,52.146 99.466,55.753 v1(98.12,57.099)
  Bottom w0.15: U1.13@70.18,94.351 70.18,93.472 69.952,93.243 65.837,93.243 64.932,94.149 64.932,96.858 65.268,97.195 93.458,97.195 94.31,96.342 v1(94.31,96.214) ; v1(88.087,63.932) 88.332,63.687 88.332,60.512 89.408,59.436 93.066,59.436 93.98,58.522 v1(93.98,58.039) 94.34,58.399 97.536,58.399 98.12,57.815 v1(98.12,57.099)
AUD1: D4.16 R1.2 | length 52.3
  Top w0.15: D4.16@93.257,64.07 94.259,64.07 94.259,65.938 93.955,66.243 v1(93.955,67.945) ; R1.2@100.429,90.462 101.194,90.462 101.635,90.02 v1(101.635,82.169)
  Bottom w0.15: v1(93.955,67.945) 96.063,67.945 98.51,70.392 98.51,70.807 96.723,72.593 94.869,72.593 94.573,72.889 93.735,72.889 93.16,72.314 90.018,72.314 89.789,72.542 89.789,73.228 92.431,75.87 95.91,75.87 97.079,77.038 97.079,79.705 97.536,80.162 98.984,80.162 99.492,79.654 99.492,78.619 99.974,78.136 101.194,78.136 101.635,78.578 v1(101.635,82.169)
AUOUT: R1.1 R4.2 U2.21 | length 56.4
  Top w0.15: v1(71.218,72.628) 71.218,71.834 71.012,71.628 71.012,70.618 72.478,69.152 72.478,67.869 72.697,67.649 73.584,67.649 73.859,67.924 73.966,67.924 73.99,67.948 74.931,67.948 U2.21@74.96,67.977 ; v1(98.253,82.72) R4.2@98.253,81.586 99.113,81.586 99.113,87.018 98.349,87.018 97.614,87.753 97.614,89.141 98.287,89.814 R1.1@98.287,90.456
  Bottom w0.15: v1(71.218,72.628) 73.05,74.461 73.05,77.216 73.32,77.485 79.001,77.485 79.585,76.902 83.407,76.902 83.569,77.064 93.878,77.064 94.336,77.521 94.336,82.093 94.75,82.507 98.04,82.507 v1(98.253,82.72)
AX: R13.2 U2.22 | length 43.4
  Top w0.15: v1(69.367,83.566) 69.367,82.347 69.46,82.347 69.46,81.28 71.155,79.585 71.155,73.379 70.643,72.867 70.643,72.224 70.361,71.942 70.361,70.845 72.178,69.028 72.178,67.666 72.494,67.349 74.103,67.349 74.103,67.477 U2.22@74.96,67.477 ; v1(84.674,85.556) 84.674,89.864 85.344,90.534 R13.2@86,90.534
  Bottom w0.15: v1(69.367,83.566) 69.367,84.531 70.393,85.556 v1(84.674,85.556)
AY: R12.2 U2.23 | length 53.7
  Top w0.15: v1(74.27,90.221) 72.111,88.062 68.961,88.062 67.869,86.97 67.869,82.575 65.511,80.218 65.511,64.705 66.843,63.373 71.399,63.373 71.628,63.602 71.628,66.266 72.339,66.977 U2.23@74.96,66.977 ; v1@77.22,91.291 78.029,90.482 R12.2@83.2,90.482
  Bottom w0.15: v1(74.27,90.221) 76.149,90.221 v1(77.165,91.237)
BOOT0: D4.44 U2.60 | length 25.3
  Top w0.15: U2.60@86.06,67.977 87.547,67.977 v1(87.782,67.742) ; v1(98.831,63.571) D4.44@101.307,63.571
  Bottom w0.15: v1(87.782,67.742) 89.385,67.742 89.625,67.502 91.034,67.502 92.465,68.933 92.465,70.714 92.812,71.06 93.472,71.06 93.733,70.799 93.733,69.088 93.08,68.435 93.08,67.462 93.472,67.07 97.598,67.07 98.831,65.837 v1(98.831,63.571)
D0: D4.18 RN2.5 U2.8 | length 55.5
  Top w0.15: v1(68.478,81.026) 68.478,84.238 68.682,84.441 70.714,84.441 70.936,84.219 RN2.5@70.936,83.425 ; U2.8@80.76,71.777 80.76,73.008 80.423,73.345 80.423,74.661 80.442,74.661 80.897,75.117 83.296,75.117 84.531,76.352 84.531,76.429 ; v1(82.017,78.105) 82.855,78.105 84.531,76.429 ; D4.18@93.257,63.07 91.034,63.07 89.697,64.407 89.697,72.048 89.498,72.247 89.498,75.997 89.066,76.429 84.531,76.429
  Bottom w0.15: v1(68.478,81.026) 68.731,81.278 78.011,81.278 78.486,81.753 80.816,81.753 81.698,80.872 81.698,78.424 v1(82.017,78.105)
D1: D4.19 RN2.6 U2.9 | length 45.8
  Top w0.15: RN2.6@71.736,83.425 v1(71.736,84.709) ; v1(78.791,81.178) v1(78.791,84.709) ; v1(81.042,78.077) 80.972,78.077 80.112,77.216 80.112,72.72 U2.9@80.26,71.777 80.26,70.714 81.174,69.799 82.448,69.799 83.16,70.51 87.909,70.51 89.332,69.088 89.332,62.992 89.753,62.571 D4.19@93.257,62.571
  Bottom w0.15: v1(71.736,84.709) v1(78.791,84.709) ; v1(78.791,81.178) 78.883,81.271 80.67,81.271 81.315,80.626 81.315,78.216 81.171,78.072 81.166,78.077 v1(81.042,78.077)
D2: D4.20 RN2.7 U2.10 | length 66.4
  Top w0.15: v1(71.603,68.453) 71.603,69.152 70.061,70.694 70.061,72.067 70.146,72.151 70.146,77.428 68.682,78.892 68.682,79.486 67.903,80.264 67.903,81.601 68.174,81.871 68.174,85.522 69.088,86.436 71.526,86.436 72.536,85.427 RN2.7@72.536,83.425 ; v1(72.746,66.345) 72.746,64.648 ; 72.778,64.552 cw(c72.885,64.657) 72.748,64.595 ; U2.10@79.76,71.777 79.76,69.698 82.753,66.704 v1(82.753,64.618) ; v1(88.214,66.421) 88.595,66.421 89.027,65.989 89.027,62.382 89.339,62.07 D4.20@93.257,62.07 ; 72.746,64.648 72.746,64.595 72.748,64.595 ; 72.746,64.648 72.735,64.648 ccw(c72.884,64.659) 72.748,64.595
  Bottom w0.15: v1(71.603,68.453) 71.603,67.488 v1(72.746,66.345) 72.746,64.308 73.117,63.936 75.29,63.936 75.82,64.467 82.603,64.467 v1(82.753,64.618) 83.871,64.618 85.674,66.421 v1(88.214,66.421)
D3: D4.39 RN2.8 U2.11 | length 73.3
  Top w0.15: RN2.8@73.336,83.425 73.336,82.906 73.914,82.328 73.914,77.165 v1(73.635,76.886) ; v1(78.613,75.184) 78.853,75.184 79.26,74.778 U2.11@79.26,71.777 79.26,63.793 79.654,63.398 v1(79.654,62.586) ; D4.39@101.307,61.07 v1(103.378,61.07)
  Bottom w0.15: v1(73.635,76.886) 73.635,76.327 74.778,75.184 v1(78.613,75.184) ; v1(79.654,62.586) 79.654,62.315 78.096,60.757 78.096,57.268 77.826,56.998 76.124,56.998 75.209,56.083 75.209,55.474 75.581,55.102 85.899,55.102 86.58,54.421 102.822,54.421 103.671,55.27 103.671,60.777 v1(103.378,61.07)
D4: D4.40 RN1.5 U2.24 | length 79.7
  Top w0.15: U2.24@74.96,66.477 74.989,66.506 75.936,66.506 76.085,66.654 76.085,70.365 v1(76.085,74.102) ; v1(78.796,76.877) 78.796,77.828 79.096,78.127 79.096,79.045 79.324,79.273 79.375,79.273 79.375,82.906 79.908,83.439 80.502,83.439 RN1.5@80.502,83.425 ; v1(90.373,72.923) v1(90.373,76.378) ; D4.40@101.307,61.571 102.413,61.571 102.87,62.028 v1(102.87,62.281)
  Bottom w0.15: v1(76.085,74.102) 78.529,74.102 79.102,74.675 81.802,74.675 82.261,75.135 82.261,75.611 81.495,76.378 81.106,76.378 ; v1(78.796,76.877) 78.945,76.877 79.22,76.602 80.882,76.602 81.106,76.378 ; v1(90.373,76.378) 81.106,76.378 ; 95.174,73.189 95.174,73.203 90.653,73.203 v1(90.373,72.923) 93.17,72.923 93.435,73.189 95.174,73.189 ; 95.174,73.189 95.174,73.152 95.402,72.923 95.414,72.923 ; 95.174,73.189 95.185,73.189 95.185,73.152 95.414,72.923 ; 95.414,72.923 101.6,72.923 102.641,71.882 ; 102.641,71.882 102.651,71.873 102.651,63.618 ; 102.641,71.882 102.641,63.627 102.651,63.618 ; 102.651,63.618 102.87,63.398 v1(102.87,62.281) 102.651,62.5 102.651,63.618
D5: D4.41 RN1.6 U2.25 | length 62.8
  Top w0.15: v1(73.355,64.511) 73.355,65.43 73.902,65.977 U2.25@74.96,65.977 ; RN1.6@81.302,83.425 81.302,82.906 81.657,82.55 83.143,82.55 85.15,80.543 85.506,80.543 86.395,79.654 86.395,78.029 87.487,76.937 89.468,76.937 89.798,76.606 89.798,72.568 90.5,71.866 v1(90.5,71.12) v1(90.5,68.783) ; v1(99.873,62.459) 99.916,62.459 100.305,62.07 D4.41@101.307,62.07
  Bottom w0.15: v1(73.355,64.511) 73.709,64.865 79.648,64.865 81.432,66.65 83.982,66.746 85.344,66.746 86.792,68.275 87.3,68.783 v1(90.5,68.783) ; v1(90.5,71.12) 90.74,71.36 93.878,71.36 94.322,70.917 94.322,69.217 93.38,68.275 93.38,67.666 93.675,67.37 99.162,67.37 99.873,66.659 v1(99.873,62.459)
D6: D4.42 RN1.7 U2.37 | length 105.5
  Top w0.15: U2.37@78.76,60.677 78.76,58.522 78.897,58.522 79.578,57.84 v1(79.578,57.302) ; RN1.7@82.102,83.425 82.102,89.002 82.711,89.611 84.074,89.611 84.074,95 84.413,95.339 103.746,95.339 104.8,94.285 104.8,63.567 105.172,63.195 105.172,62.551 104.851,62.23 103.902,62.23 ; D4.42@101.307,62.571 102.28,62.571 102.565,62.856 103.276,62.856 103.902,62.23 ; v1(102.496,59.207) 103.013,59.207 103.953,60.147 103.953,62.179 103.902,62.23
  Bottom w0.15: v1(79.578,57.302) 79.993,57.717 87.11,57.717 87.257,57.57 92.699,57.57 93.105,57.164 94.855,57.164 95.261,57.57 96.723,57.57 97.222,57.071 97.222,56.224 101.6,56.224 102.496,57.121 v1(102.496,59.207)
D7: D4.43 RN1.8 U2.38 | length 94.3
  Top w0.15: U2.38@79.26,60.677 79.26,58.639 79.858,58.042 81.328,58.042 82.474,56.896 v1(82.474,53.682) ; RN1.8@82.902,83.425 82.902,83.21 84.658,83.21 v1(86.385,81.483) ; v1(104.597,62.814) 104.191,63.221 102.057,63.221 ; 102.057,63.221 102.057,63.07 D4.43@101.307,63.07 102.057,63.221
  Bottom w0.15: v1(82.474,53.682) 104.038,53.682 104.597,54.24 v1(104.597,62.814) 106.477,62.814 107.569,63.906 107.569,82.211 106.477,83.303 96.94,83.303 96.444,82.807 93.585,82.807 93.1,82.322 92.347,82.322 92.177,82.152 92.177,81.077 91.897,80.797 90.373,80.797 89.891,81.483 v1(86.385,81.483)
EXTIN: ?.1 U1.26 | length 9.3
  Top w0.15: ?.1@91.44,84.836 93.472,84.836 94.386,83.922 94.386,83.461 94.465,83.461 94.465,80.686 94.615,80.686 94.615,79.111 U1.26@95.58,79.111
FULL_OUT: C9.2 J8.1 R3.1 R4.1 R5.2 | length 45.2
  Top w0.15: R3.1@98.253,86.158 97.598,86.158 97.393,85.954 97.393,80.721 100.178,80.721 100.395,80.939 R4.1@100.395,81.592 ; R5.2@100.395,83.878 R4.1@100.395,81.592 ; C9.2@102.6,55.372 102.6,55.753 104.329,55.753 105.472,56.896 105.472,64.096 105.385,64.096 v1(105.385,80.112) ; J8.1@103.632,81.118 102.227,81.118 101.752,81.592 R4.1@100.395,81.592
  Bottom w0.15: J8.1@103.632,81.118 103.632,80.518 104.038,80.112 v1(105.385,80.112)
FULL_OUT_OPT: J7.1 U5.6 U5.7 | length 43.4
  Top w0.15: U5.7@93.345,53.708 U5.6@94.615,53.708 94.615,52.451 v1(95.047,52.019) ; v1(105.181,55.169) 106.033,55.169 106.947,56.083 106.947,81.118 J7.1@106.172,81.118
  Bottom w0.15: v1(95.047,52.019) 95.123,52.019 96.342,53.238 104.775,53.238 105.181,53.645 v1(105.181,55.169)